# EAGLE board PumpBlock (EAGLE 9.1.0)

Size 160 x 100 mm. Coordinates in mm from the lower left corner, seen from the top.
Outline: 0,0 160,0 160,100 0,100 0,0
Copper layers (1*16): Top 0.035mm / dielectric 1.5mm / Bottom 0.035mm
Design rules "default": minimum track width 6mil, minimum drill 0.35mm, track to track 6mil, track to pad 6mil, pad to pad 6mil, via to via 6mil, smd to smd 6mil, copper to edge 40mil, drill to drill 6mil, minimum pad ring 10mil, minimum via ring 8mil, stop-mask expansion 4mil, vias tented up to drill 0mil, thermal gap 10mil

## Footprints (pad centres in the part's own frame; a part is rotated, then mirrored left to right if it is on the bottom)
DO41-10 = drill 1.118: A 5.08,0; C -5.08,0
MSTBV2 = drill 1.397 long: 1 -2.5,0; 2 2.5,0
G5LE = drill 1.321 long: 1 -7.493,-5.969; 2 -7.493,5.969; O 4.699,5.969; P -9.525,0; S 4.699,-5.969
0207/12 = drill 0.813 octagon: 1 -6.35,0; 2 6.35,0
TO92 = drill 0.813 octagon: 1 1.27,0; 2 0,1.905; 3 -1.27,0

## Placement (x,y rotation side)
D1  1N4004  [DO41-10]  44.45,44.45 90 top
D2  1N4004  [DO41-10]  6.35,-41.91 0 top  (outside the outline)
FAN  [MSTBV2]  6.35,-13.97 0 top  (outside the outline)
K1  G5LE  [G5LE]  59.69,44.45 0 top
K2  G5LE  [G5LE]  12.7,-29.21 0 top  (outside the outline)
PUMP  [MSTBV2]  17.78,3.81 0 top
R1  [0207/12]  36.83,40.64 90 top
R2  [0207/12]  57.15,33.02 180 top
R3  [0207/12]  7.62,-49.53 0 top  (outside the outline)
R4  [0207/12]  22.86,-49.53 0 top  (outside the outline)
T1  2N3704  [TO92]  36.83,50.8 270 top
T2  2N3704  [TO92]  15.24,-41.91 0 top  (outside the outline)

## Library data of the parts
D1 D2 = diode
FAN PUMP = con-phoenix-500; OC_FARNELL: unknown; OC_NEWARK: unknown
K1 K2 = relay; OC_FARNELL: unknown; OC_NEWARK: unknown
R1-R4 = resistor
T1 T2 = transistor

## Nets
+12V: K1.S K2.S R2.1 R4.1
GND: FAN.2 PUMP.2 T1.3 T2.3
N$1: R1.2 T1.1
N$2: D1.A K1.2 T1.2
N$3: D1.C K1.1 R2.2
N$4: D2.A K2.2 T2.2
N$5: K1.P PUMP.1
N$6: D2.C K2.1 R4.2
N$7: FAN.1 K2.P
N$8: R3.2 T2.1

## Tracks (layer width: path | path; a pad name or v marks a point on that pad's centre or on a via)
+12V  (3 unrouted)
GND  (3 unrouted)
N$1  (1 unrouted)
N$2  (2 unrouted)
N$3  (2 unrouted)
N$4  (2 unrouted)
N$5  (1 unrouted)
N$6  (2 unrouted)
N$7  (1 unrouted)
N$8  (1 unrouted)